# Altium PCB 底板20160428.PcbDoc (part 5 of 5)
Units mm, origin at the board's own origin, x right, y up, seen from the top; angles counter-clockwise.
Board outline 123.72 x 102.71 mm, 2 copper layers (Top Layer, Bottom Layer); 224 components, 227 nets, 768 pads, 282 vias.
Unrouted connection lines stored in the file: 2.
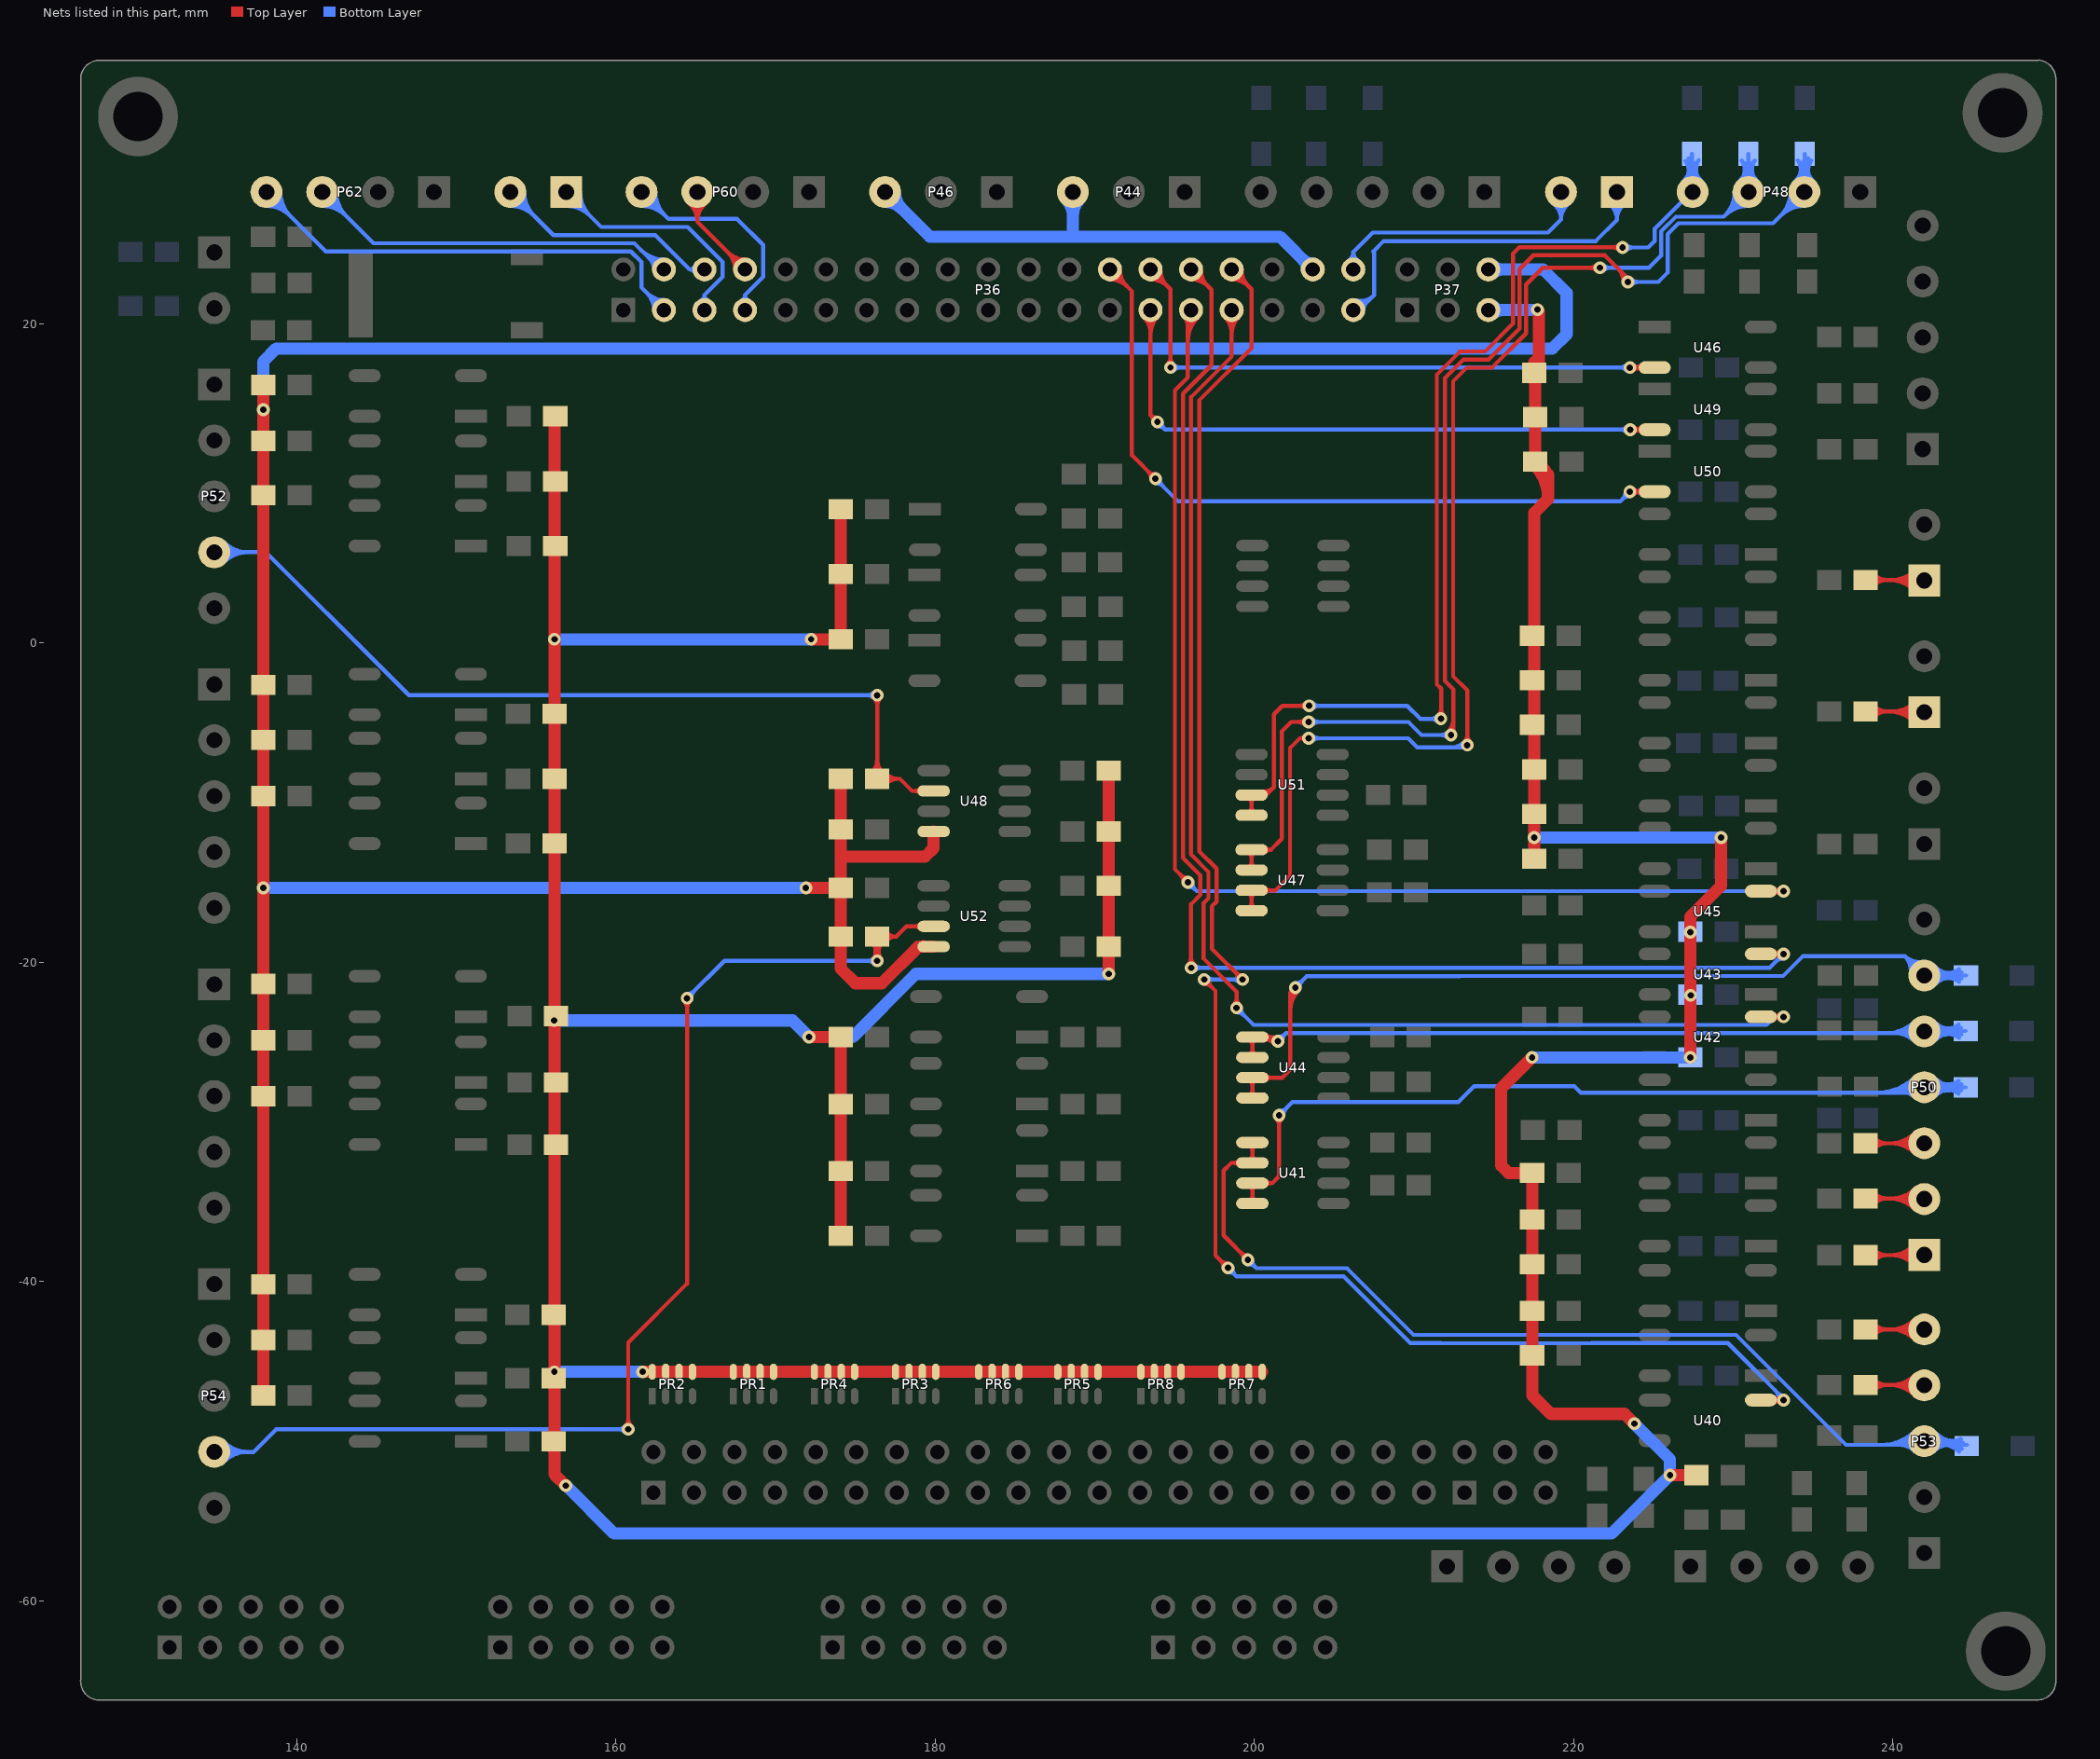
[diagram p5: the nets of this part, all layers, seen from the top]

## Via types
v1: diameter 0.8, hole 0.4, Top Layer to Bottom Layer, 282 vias

## Nets (pads, with @x,y where several pads share a name; then routed paths per layer and width w, separated by ;. In a path a pad name is that pad's centre, name@x,y a point inside that pad or via, vN(x,y) a via of type N, cw(c..) or ccw(c..) an arc to the next point about the centre after c; other vN are vias at no path point) (continued)
PWM33: P52.4 R117.1 U48.6 | length 66.8
  Top Layer w0.254: R117.1@176.018,-8.15 ccw(c175.151,-7.283) 176.378,-7.283 ccw(c177.604,-7.283) R117.1@176.737,-8.15 ; v1@176.185,-3.47 cw(c175.719,-3.936) 176.378,-3.936 cw(c177.037,-3.936) v1@176.571,-3.47 ; v1(176.378,-3.277) R117.1@176.378,-8.509 177.8,-8.509 178.562,-9.271 U48.6@179.908,-9.271 ; R117.1@176.864,-8.868 cw(c177.731,-9.735) 177.731,-8.509 cw(c177.731,-7.283) R117.1@176.864,-8.15 ; U48.6@179.086,-9.433 ccw(c178.696,-9.823) 178.696,-9.271 ccw(c178.696,-8.719) U48.6@179.086,-9.109
  Bottom Layer w0.254: P52.4@134.849,5.681 138.083,5.681 145.669,-1.905 147.041,-3.277 v1(176.378,-3.277) ; P52.4@135.286,5.243 cw(c136.343,4.186) 136.343,5.681 cw(c136.343,7.175) P52.4@135.286,6.118 ; P52.4@135.466,5.063 cw(c136.956,3.573) 136.956,5.681 cw(c136.956,7.788) P52.4@135.466,6.298 ; v1@176.185,-3.47 ccw(c175.719,-3.936) 175.719,-3.277 ccw(c175.719,-2.618) v1@176.185,-3.084
PWM44: P54.4 R134.2 U52.7 | length 91.4
  Top Layer w0.254: v1@160.589,-49.058 ccw(c160.123,-48.592) 160.782,-48.592 ccw(c161.441,-48.592) v1@160.975,-49.058 ; v1(160.782,-49.251) 160.782,-43.815 164.465,-40.132 v1(164.465,-22.25) ; v1@164.272,-22.443 cw(c163.806,-22.909) 164.465,-22.909 cw(c165.124,-22.909) v1@164.658,-22.443 ; R134.2@176.018,-18.749 cw(c175.151,-19.616) 176.378,-19.616 cw(c177.604,-19.616) R134.2@176.737,-18.749 ; v1@176.148,-19.765 ccw(c175.484,-19.336) 176.248,-19.132 ; v1@176.185,-19.721 ccw(c175.719,-19.255) 176.378,-19.255 ccw(c177.037,-19.255) v1@176.571,-19.721 ; v1@176.241,-19.677 ccw(c176.043,-19.334) 176.426,-19.437 ; 176.33,-19.437 ccw(c176.712,-19.334) v1@176.514,-19.677 ; v1(176.378,-19.914) R134.2@176.378,-18.39 177.571,-18.39 ; 176.507,-19.132 ccw(c177.271,-19.336) v1@176.607,-19.765 ; R134.2@176.899,-18.71 cw(c177.571,-19.256) 177.571,-18.39 ; R134.2@176.899,-18.069 ccw(c177.571,-17.524) 177.571,-18.39 ; U52.7@179.086,-17.916 ccw(c178.696,-18.306) 178.696,-17.755 ccw(c178.696,-17.203) U52.7@179.086,-17.593 ; U52.7@179.908,-17.755 178.206,-17.755 177.571,-18.39
  Bottom Layer w0.254: P54.4@134.849,-50.657 134.864,-50.673 137.312,-50.673 138.735,-49.251 v1(160.782,-49.251) ; P54.4@135.286,-51.095 cw(c136.305,-52.114) 136.305,-50.673 ; P54.4@135.286,-50.22 ccw(c136.381,-49.125) 136.381,-50.673 ; P54.4@135.466,-51.275 cw(c136.919,-52.727) 136.919,-50.673 ; P54.4@135.466,-50.04 ccw(c136.994,-48.512) 136.994,-50.673 ; v1@160.589,-49.444 ccw(c160.123,-49.91) 160.123,-49.251 ccw(c160.123,-48.592) v1@160.589,-49.058 ; v1(164.465,-22.25) 166.802,-19.914 v1(176.378,-19.914) ; v1@164.465,-21.977 ccw(c164.465,-21.318) 164.931,-21.784 ccw(c165.397,-22.25) v1@164.738,-22.25 ; v1@176.185,-20.107 ccw(c175.719,-20.573) 175.719,-19.914 ccw(c175.719,-19.255) v1@176.185,-19.721
QD_KR1: D22.2 P43.1 | length 11.2
  Top Layer w0.254: D22.2@238.295,3.944 P43.1@241.928,3.944 ; D22.2@238.781,3.585 cw(c239.648,2.717) 239.648,3.944 cw(c239.648,5.17) D22.2@238.781,4.303 ; 239.775,3.944 cw(c239.775,1.726) P43.1@241.343,3.294 ; 239.93,3.944 ccw(c239.93,5.942) P43.1@241.343,4.529 ; 240.388,3.944 cw(c240.388,2.34) P43.1@241.523,3.474 ; 240.544,3.944 ccw(c240.544,5.328) P43.1@241.523,4.349
QYG_KC1: P36.32 U40.3 | length 122.4
  Top Layer w0.254: v1@196.85,-21.355 cw(c196.85,-22.014) 197.316,-21.548 cw(c197.782,-21.082) v1@197.123,-21.082 ; v1(196.85,-21.082) 197.561,-21.793 197.561,-38.354 v1(198.349,-39.141) ; v1@198.076,-39.141 ccw(c197.417,-39.141) 197.883,-38.675 ccw(c198.349,-38.209) v1@198.349,-38.868 ; P36.32@198.577,22.77 cw(c198.577,21.266) 199.641,22.33 cw(c200.704,23.393) P36.32@199.2,23.393 ; P36.32@198.577,23.024 cw(c198.577,22.134) 199.207,22.763 cw(c199.837,23.393) P36.32@198.946,23.393 ; P36.32@198.577,23.393 199.822,22.149 199.822,18.47 196.545,15.193 196.545,-13.048 197.631,-14.133 197.631,-16.201 197.333,-16.499 197.333,-19.152 v1(199.263,-21.082) ; v1@198.99,-21.082 ccw(c198.331,-21.082) 198.797,-20.616 ccw(c199.263,-20.15) v1@199.263,-20.809 ; U40.3@231.796,-47.421 v1(233.147,-47.422) ; U40.3@232.485,-47.421 cw(c232.485,-48.083) v1@232.954,-47.615 ; U40.3@232.49,-47.421 ccw(c232.49,-46.765) v1@232.954,-47.229 ; U40.3@232.517,-47.614 cw(c232.983,-48.08) 232.983,-47.421 cw(c232.983,-46.762) U40.3@232.517,-47.228 ; v1@232.887,-47.507 ccw(c232.661,-47.58) 232.723,-47.351 ccw(c232.768,-47.182) v1@232.916,-47.276 ; v1@232.887,-47.337 cw(c232.666,-47.265) 232.726,-47.49 cw(c232.77,-47.653) v1@232.914,-47.565
  Bottom Layer w0.254: v1(196.85,-21.082) v1(199.263,-21.082) ; v1@197.043,-21.275 cw(c197.509,-21.741) 197.509,-21.082 cw(c197.509,-20.423) v1@197.043,-20.889 ; v1@198.349,-39.414 cw(c198.349,-40.073) 198.815,-39.607 cw(c199.281,-39.141) v1@198.622,-39.141 ; v1(198.349,-39.141) 198.882,-39.675 205.588,-39.675 209.76,-43.847 211.665,-43.847 211.684,-43.866 221.12,-43.866 221.139,-43.847 229.662,-43.847 233.147,-47.331 v1(233.147,-47.422) ; v1@199.07,-21.275 ccw(c198.604,-21.741) 198.604,-21.082 ccw(c198.604,-20.423) v1@199.07,-20.889 ; 232.617,-46.801 cw(c231.996,-47.422) v1@232.874,-47.422 ; 232.835,-47.02 ccw(c233.147,-46.708) v1@233.147,-47.149
QYG_KC11: D56.1 P53.3 U41.5 U41.6 | length 84.5
  Top Layer w0.254: U41.6@199.051,-32.724 ccw(c198.66,-33.115) 198.66,-32.563 ccw(c198.66,-32.011) U41.6@199.051,-32.401 ; v1@199.32,-38.633 ccw(c198.661,-38.633) 199.127,-38.167 ccw(c199.593,-37.701) v1@199.593,-38.36 ; v1(199.593,-38.633) 198.069,-37.109 198.069,-33.045 198.552,-32.563 U41.6@199.873,-32.563 U41.5@199.873,-31.293 ; U41.6@199.711,-32.401 ccw(c199.321,-32.011) 199.873,-32.011 ccw(c200.424,-32.011) U41.6@200.034,-32.401 ; U41.5@199.711,-31.454 cw(c199.321,-31.845) 199.873,-31.845 cw(c200.424,-31.845) U41.5@200.034,-31.454
  Bottom Layer w0.254: v1@199.593,-38.906 cw(c199.593,-39.565) 200.059,-39.099 cw(c200.525,-38.633) v1@199.866,-38.633 ; v1(199.593,-38.633) 200.127,-39.167 205.798,-39.167 209.97,-43.339 230.168,-43.339 237.055,-50.226 D56.1@244.627,-50.226 ; 239.301,-50.226 ccw(c239.301,-47.338) P53.3@241.343,-49.38 ; 239.914,-50.226 ccw(c239.914,-47.951) P53.3@241.523,-49.56 ; 240.405,-50.226 cw(c240.405,-51.553) P53.3@241.343,-50.615 ; 240.527,-50.226 ccw(c240.527,-48.565) P53.3@241.702,-49.74 ; P53.3@242.218,-49.74 ccw(c243.393,-48.565) 243.393,-50.226 ; P53.3@242.398,-49.56 ccw(c244.007,-47.951) D56.1@244.007,-50.226 ; P53.3@242.578,-50.615 cw(c243.516,-51.553) 243.516,-50.226 ; P53.3@242.578,-49.38 ccw(c244.62,-47.338) D56.1@244.62,-50.226 ; 243.115,-50.226 cw(c243.115,-51.677) D56.1@244.141,-50.651 ; 243.12,-49.824 cw(c242.719,-51.321) D56.1@244.06,-50.546 ; 243.212,-50.065 ccw(c243.479,-48.751) D56.1@244.22,-49.869 ; 243.371,-50.097 cw(c243.15,-51.187) D56.1@244.077,-50.573 ; 243.433,-50.226 ccw(c243.433,-49.224) D56.1@244.141,-49.933 ; 243.561,-49.942 ccw(c243.794,-49.069) D56.1@244.246,-49.852 ; 243.712,-49.983 cw(c243.47,-50.887) D56.1@244.28,-50.419 ; 243.728,-50.226 cw(c243.728,-51.064) D56.1@244.321,-50.472 ; 243.813,-50.187 ccw(c243.958,-49.474) D56.1@244.36,-50.08
QYG_KR1: D15.2 P53.4 | length 11.2
  Top Layer w0.254: D15.2@238.295,-46.475 P53.4@241.938,-46.475 ; D15.2@238.781,-46.834 cw(c239.648,-47.702) 239.648,-46.475 cw(c239.648,-45.249) D15.2@238.781,-46.116 ; 239.799,-46.475 cw(c239.799,-48.659) P53.4@241.343,-47.115 ; 239.907,-46.475 ccw(c239.907,-44.444) P53.4@241.343,-45.88 ; 240.412,-46.475 cw(c240.412,-48.046) P53.4@241.523,-46.935 ; 240.52,-46.475 ccw(c240.52,-45.057) P53.4@241.523,-46.06
QYG_KR2: D19.2 P53.5 | length 11.2
  Top Layer w0.254: D19.2@238.295,-42.995 P53.5@241.958,-42.995 ; D19.2@238.781,-43.355 cw(c239.648,-44.222) 239.648,-42.995 cw(c239.648,-41.769) D19.2@238.781,-42.636 ; 239.848,-42.995 cw(c239.848,-45.11) P53.5@241.343,-43.615 ; 239.858,-42.995 ccw(c239.858,-40.895) P53.5@241.343,-42.38 ; 240.461,-42.995 cw(c240.461,-44.497) P53.5@241.523,-43.435 ; 240.471,-42.995 ccw(c240.471,-41.508) P53.5@241.523,-42.56
RS485_1A: P36.7 P60.4 | length 20.1
  Bottom Layer w0.254: P60.4@161.61,27.372 cw(c161.61,25.264) 163.101,26.754 cw(c164.591,28.245) P60.4@162.483,28.245 ; P60.4@161.61,27.626 cw(c161.61,26.131) 162.667,27.188 cw(c163.724,28.245) P60.4@162.229,28.245 ; P60.4@161.61,28.245 163.299,26.556 166.534,26.556 167.601,26.556 169.228,24.929 169.228,23.862 169.228,22.925 168.097,21.794 ; P36.7@167.854,21.427 ccw(c167.699,21.794) 168.097,21.794 ; P36.7@168.097,20.853 168.097,21.794 ; P36.7@168.34,21.427 cw(c168.496,21.794) 168.097,21.794
RS485_1B: P36.8 P60.3 | length 14.7
  Top Layer w0.254: P60.3@164.551,27.574 cw(c163.556,26.38) 165.11,26.38 ; P60.3@164.714,27.769 cw(c164.008,26.923) 165.11,26.923 cw(c166.213,26.923) P60.3@165.507,27.769 ; P60.3@165.11,28.245 165.11,26.38 ; P60.3@165.669,27.574 ccw(c166.665,26.38) 165.11,26.38 ; P36.8@167.474,23.393 ccw(c165.97,23.393) 167.034,24.457 ccw(c168.097,25.52) P36.8@168.097,24.016 ; P36.8@167.728,23.393 ccw(c166.837,23.393) 167.467,24.023 ccw(c168.097,24.653) P36.8@168.097,23.762 ; P36.8@168.097,23.604 P36.8@168.097,23.393 165.989,25.502 165.11,26.38
RS485_2A: P36.38 P61.2 | length 22.1
  Bottom Layer w0.254: P36.38@205.88,23.93 ccw(c205.551,24.486) 206.197,24.486 ; P36.38@206.197,23.393 206.197,24.486 ; P36.38@206.514,23.93 cw(c206.843,24.486) 206.197,24.486 ; P61.2@218.691,27.541 cw(c217.946,26.523) 219.207,26.523 ; P61.2@218.841,27.745 cw(c218.313,27.024) 219.207,27.024 cw(c220.102,27.024) P61.2@219.573,27.745 ; P61.2@219.207,28.245 219.207,26.523 ; P61.2@219.723,27.541 ccw(c220.469,26.523) 219.207,26.523 ; 206.197,24.486 207.416,25.705 218.389,25.705 219.207,26.523
RS485_2B: P36.37 P61.1 | length 29.1
  Bottom Layer w0.254: P36.37@206.197,20.853 206.578,20.853 207.493,21.768 ; P36.37@206.289,21.211 ccw(c206.521,22.11) 207.178,21.453 ; P36.37@206.353,21.457 ccw(c206.65,22.61) 207.493,21.768 ; P36.37@206.82,20.853 cw(c207.404,20.853) 206.991,21.267 ; P61.1@222.181,27.548 cw(c221.385,26.492) 222.707,26.492 ; P61.1@222.334,27.751 cw(c221.769,27.002) 222.707,27.002 cw(c223.645,27.002) P61.1@223.08,27.751 ; P61.1@222.707,28.245 222.707,26.492 ; P61.1@223.233,27.548 ccw(c224.03,26.492) 222.707,26.492 ; 207.493,21.768 207.493,24.46 207.442,24.511 208.102,25.171 221.386,25.171 222.707,26.492
SPE+: P36.5 P42.1 | length 21.7
  Bottom Layer w0.254: P42.1@156.896,27.372 cw(c156.896,25.264) 158.386,26.754 cw(c159.876,28.245) P42.1@157.769,28.245 ; P42.1@156.896,27.626 cw(c156.896,26.131) 157.952,27.188 cw(c159.009,28.245) P42.1@157.515,28.245 ; P42.1@156.896,28.245 159.092,26.048 164.502,26.048 166.688,23.862 166.688,22.925 165.557,21.794 ; P36.5@165.314,21.427 ccw(c165.159,21.794) 165.557,21.794 ; P36.5@165.557,20.853 165.557,21.794 ; P36.5@165.8,21.427 cw(c165.956,21.794) 165.557,21.794
SPE-: P36.6 P42.2 | length 20.8
  Bottom Layer w0.254: P42.2@153.396,27.372 cw(c153.396,25.264) 154.886,26.754 cw(c156.376,28.245) P42.2@154.269,28.245 ; P42.2@153.396,27.626 cw(c153.396,26.131) 154.452,27.188 cw(c155.509,28.245) P42.2@154.015,28.245 ; P42.2@153.396,28.245 156.1,25.54 162.47,25.54 164.617,23.393 ; P36.6@164.984,23.15 ccw(c164.617,22.995) 164.617,23.393 ; P36.6@164.984,23.636 cw(c164.617,23.792) 164.617,23.393 ; P36.6@165.557,23.393 164.617,23.393
SSD_KC1: P36.28 U46.3 | length 47.2
  Top Layer w0.254: P36.28@193.497,22.77 cw(c193.497,21.266) 194.561,22.33 cw(c195.624,23.393) P36.28@194.12,23.393 ; P36.28@193.497,23.024 cw(c193.497,22.134) 194.127,22.763 cw(c194.757,23.393) P36.28@193.866,23.393 ; P36.28@193.497,23.393 194.742,22.149 v1(194.742,17.247) ; v1@194.549,17.44 ccw(c194.083,17.906) 194.742,17.906 ccw(c195.401,17.906) v1@194.935,17.44 ; v1(223.521,17.246) U46.3@225.074,17.246 ; v1@223.714,17.053 cw(c224.18,16.587) 224.18,17.246 cw(c224.18,17.905) v1@223.714,17.439 ; v1@223.746,17.091 cw(c223.953,16.95) 224.017,17.191 ; v1@223.746,17.4 ccw(c223.953,17.541) 224.017,17.3 ; v1@223.757,17.109 cw(c224.103,16.909) 224,17.295 ; v1@223.757,17.382 ccw(c224.103,17.582) 224,17.196 ; U46.3@224.281,17.053 ccw(c223.815,16.587) 223.815,17.246 ccw(c223.815,17.905) U46.3@224.281,17.439
  Bottom Layer w0.254: v1(194.742,17.247) v1(223.521,17.246) ; v1@194.935,17.054 cw(c195.401,16.587) 195.401,17.247 cw(c195.401,17.906) v1@194.935,17.44 ; v1@223.328,17.053 ccw(c222.862,16.587) 222.862,17.246 ccw(c222.862,17.905) v1@223.328,17.439
SSD_KC2: P36.27 U49.3 | length 48.6
  Top Layer w0.254: P36.27@193.057,20.413 cw(c191.993,19.349) 193.497,19.349 cw(c195.001,19.349) P36.27@193.938,20.413 ; P36.27@193.236,20.592 cw(c192.606,19.963) 193.497,19.963 cw(c194.388,19.963) P36.27@193.758,20.592 ; P36.27@193.497,20.853 193.497,14.275 ; v1@193.656,13.858 ccw(c193.111,13.888) 193.497,14.275 ; v1@193.914,14.116 cw(c193.884,14.661) 193.497,14.275 ; v1(193.929,13.843) 193.497,14.275 ; v1(223.544,13.359) U49.3@225.074,13.359 ; v1@223.737,13.166 cw(c224.203,12.7) 224.203,13.359 cw(c224.203,14.018) v1@223.737,13.552 ; v1@223.771,13.207 cw(c223.966,13.074) 224.027,13.302 cw(c224.131,13.688) v1@223.783,13.493 ; v1@223.771,13.512 ccw(c223.966,13.644) 224.027,13.416 ccw(c224.131,13.031) v1@223.783,13.226 ; U49.3@224.281,13.166 ccw(c223.815,12.7) 223.815,13.359 ccw(c223.815,14.018) U49.3@224.281,13.552
  Bottom Layer w0.254: v1@193.929,13.57 cw(c193.929,12.911) 194.395,13.377 cw(c194.861,13.843) v1@194.202,13.843 ; v1(193.929,13.843) 194.413,13.359 v1(223.544,13.359) ; v1@223.351,13.166 ccw(c222.885,12.7) 222.885,13.359 ccw(c222.885,14.018) v1@223.351,13.552
SSD_KC3: P36.26 U50.3 | length 56.6
  Top Layer w0.254: P36.26@190.957,22.77 cw(c190.957,21.266) 192.021,22.33 cw(c193.084,23.393) P36.26@191.58,23.393 ; P36.26@190.957,23.024 cw(c190.957,22.134) 191.587,22.763 cw(c192.217,23.393) P36.26@191.326,23.393 ; P36.26@190.957,23.393 192.329,22.022 192.329,11.76 v1(193.802,10.287) ; v1@193.529,10.287 ccw(c192.87,10.287) 193.336,10.753 ccw(c193.802,11.219) v1@193.802,10.56 ; v1(223.521,9.473) v1(223.521,9.473) U50.3@225.074,9.473 ; v1@223.714,9.28 cw(c224.18,8.814) 224.18,9.473 cw(c224.18,10.132) v1@223.714,9.666 ; v1@223.746,9.319 cw(c223.953,9.177) 224.017,9.419 ; v1@223.746,9.628 ccw(c223.953,9.769) 224.017,9.527 ; v1@223.757,9.337 cw(c224.103,9.137) 224,9.523 ; v1@223.757,9.61 ccw(c224.103,9.809) 224,9.424 ; U50.3@224.281,9.28 ccw(c223.815,8.814) 223.815,9.473 ccw(c223.815,10.132) U50.3@224.281,9.666
  Bottom Layer w0.254: v1@193.802,10.014 cw(c193.802,9.355) 194.268,9.821 cw(c194.734,10.287) v1@194.075,10.287 ; v1(193.802,10.287) 195.224,8.865 222.912,8.865 v1(223.521,9.473) ; v1@223.248,9.473 cw(c222.589,9.473) 223.055,9.007 cw(c223.521,8.541) v1@223.521,9.2
SSD_KC11: D46.1 P48.2 U47.5 U47.6 | length 106
  Top Layer w0.254: U47.6@199.66,-14.062 ccw(c199.27,-13.672) 199.822,-13.672 ccw(c200.374,-13.672) U47.6@199.983,-14.062 ; U47.5@199.66,-13.116 cw(c199.27,-13.506) 199.822,-13.506 cw(c200.374,-13.506) U47.5@199.983,-13.116 ; U47.6@199.822,-14.224 U47.5@199.822,-12.954 201.041,-12.954 201.727,-12.268 201.727,-5.537 202.311,-4.953 v1@203.378,-4.953 ; U47.5@200.644,-13.116 cw(c201.034,-13.506) 201.034,-12.954 cw(c201.034,-12.402) U47.5@200.644,-12.792 ; v1@203.21,-5.146 ccw(c202.744,-5.612) 202.744,-4.953 ccw(c202.744,-4.294) v1@203.21,-4.76 ; v1@212.126,-5.573 ccw(c211.307,-4.754) 212.465,-4.754 ; v1@212.305,-5.752 ccw(c211.92,-5.367) 212.465,-5.367 ; v1@212.465,-5.62 212.465,-2.907 211.938,-2.38 211.938,16.593 213.092,17.748 214.667,17.748 216.611,19.692 216.611,23.408 217.486,24.282 221.005,24.282 ; 221.964,24.276 221.952,24.276 ; 222.765,23.462 cw(c221.909,22.606) v1@223.12,22.606 ; 223.199,23.029 cw(c222.776,22.606) v1@223.374,22.606 ; v1@223.393,22.835 221.952,24.276 ; 221.005,24.282 221.012,24.276 221.952,24.276 ; 221.005,24.282 221.945,24.282 221.952,24.276
  Bottom Layer w0.254: v1(203.403,-4.953) 209.652,-4.953 210.464,-5.766 v1(212.319,-5.766) ; v1@203.596,-5.146 cw(c204.062,-5.612) 204.062,-4.953 cw(c204.062,-4.294) v1@203.596,-4.76 ; v1@212.126,-5.959 ccw(c211.66,-6.425) 211.66,-5.766 ccw(c211.66,-5.107) v1@212.126,-5.573 ; v1(223.393,22.606) 225.298,22.606 225.882,23.19 225.882,25.603 226.568,26.289 232.491,26.289 P48.2@234.447,28.245 ; v1@223.586,22.413 cw(c224.052,21.947) 224.052,22.606 cw(c224.052,23.265) v1@223.586,22.799 ; P48.2@233.574,28.245 cw(c231.467,28.245) 232.957,26.754 cw(c234.447,25.264) P48.2@234.447,27.372 ; P48.2@233.828,28.245 cw(c232.334,28.245) 233.39,27.188 cw(c234.447,26.131) P48.2@234.447,27.626 ; P48.2@233.83,28.862 ccw(c232.291,30.401) D46.1@234.467,30.401 ; P48.2@234.01,28.682 ccw(c232.904,29.788) 234.467,29.788 ; D46.1@234.045,30.223 cw(c233.162,29.633) 234.188,29.358 ; D46.1@234.108,30.146 cw(c233.241,29.279) 234.467,29.279 cw(c235.694,29.279) D46.1@234.827,30.146 ; 234.193,29.377 cw(c235.289,29.083) D46.1@234.721,30.065 ; D46.1@234.213,30.065 cw(c233.689,29.158) 234.702,29.429 ; P48.2@234.467,28.265 D46.1@234.467,30.632 ; 234.467,29.69 ccw(c235.893,29.69) P48.2@234.885,28.682 ; D46.1@234.467,30.304 ccw(c236.506,30.304) P48.2@235.065,28.862 ; D46.1@234.581,29.88 cw(c235.117,30.023) D46.1@234.671,30.354 ; 234.717,29.372 cw(c235.656,29.623) D46.1@234.875,30.203
SSD_KC22: D48.1 P48.3 U47.7 U47.8 | length 100.9
  Top Layer w0.254: U47.8@199.66,-16.602 ccw(c199.27,-16.212) 199.822,-16.212 ccw(c200.374,-16.212) U47.8@199.983,-16.602 ; U47.7@199.66,-15.656 cw(c199.27,-16.046) 199.822,-16.046 cw(c200.374,-16.046) U47.7@199.983,-15.656 ; U47.8@199.822,-16.764 U47.7@199.822,-15.494 201.32,-15.494 202.235,-14.58 202.235,-6.579 202.844,-5.969 ; U47.7@200.644,-15.656 cw(c201.034,-16.046) 201.034,-15.494 cw(c201.034,-14.942) U47.7@200.644,-15.332 ; v1@203.188,-6.137 ccw(c202.844,-6.404) 202.844,-5.969 ; v1@203.188,-5.801 cw(c202.844,-5.534) 202.844,-5.969 ; v1@203.378,-5.969 202.844,-5.969 ; v1@213.142,-6.208 ccw(c212.676,-5.742) 213.335,-5.742 ccw(c213.994,-5.742) v1@213.528,-6.208 ; v1(213.335,-6.401) 213.335,-2.972 212.446,-2.083 212.446,16.383 213.303,17.24 214.878,17.24 217.018,19.38 217.018,22.443 218.07,23.495 v1(221.64,23.495) ; v1@221.447,23.302 ccw(c220.981,22.836) 220.981,23.495 ccw(c220.981,24.154) v1@221.447,23.688
  Bottom Layer w0.254: v1(203.403,-5.969) 209.626,-5.969 210.204,-6.547 213.189,-6.547 v1(213.335,-6.401) ; v1@203.596,-6.162 cw(c204.062,-6.628) 204.062,-5.969 cw(c204.062,-5.31) v1@203.596,-5.776 ; 212.323,-6.547 ccw(c212.323,-5.389) v1@213.142,-6.208 ; 212.936,-6.547 ccw(c212.936,-6.002) v1@213.321,-6.387 ; v1(221.64,23.495) 224.714,23.495 225.476,24.257 225.476,25.772 226.4,26.695 229.398,26.695 P48.3@230.947,28.245 ; v1@221.833,23.302 cw(c222.299,22.836) 222.299,23.495 cw(c222.299,24.154) v1@221.833,23.688 ; P48.3@230.074,28.245 cw(c227.967,28.245) 229.457,26.754 cw(c230.947,25.264) P48.3@230.947,27.372 ; P48.3@230.328,28.245 cw(c228.834,28.245) 229.89,27.188 cw(c230.947,26.131) P48.3@230.947,27.626 ; P48.3@230.33,28.862 ccw(c228.865,30.327) D48.1@230.937,30.327 ; P48.3@230.509,28.682 ccw(c229.478,29.714) 230.937,29.714 ; D48.1@230.525,30.208 cw(c229.72,29.625) 230.68,29.368 ; D48.1@230.578,30.146 cw(c229.71,29.279) 230.937,29.279 cw(c232.163,29.279) D48.1@231.296,30.146 ; D48.1@230.683,30.065 cw(c230.126,29.101) 231.202,29.389 ; 230.693,29.416 cw(c231.725,29.14) D48.1@231.191,30.065 ; P48.3@230.937,28.255 D48.1@230.937,30.632 ; 230.937,29.764 ccw(c232.467,29.764) P48.3@231.385,28.682 ; D48.1@230.937,30.378 ccw(c233.08,30.378) P48.3@231.565,28.862 ; 231.209,29.361 cw(c232.213,29.63) D48.1@231.356,30.218
SSD_KC33: D50.1 P48.4 U51.7 U51.8 | length 87.1
  Top Layer w0.254: U51.8@199.66,-10.633 ccw(c199.27,-10.243) 199.822,-10.243 ccw(c200.374,-10.243) U51.8@199.983,-10.633 ; U51.7@199.66,-9.687 cw(c199.27,-10.077) 199.822,-10.077 cw(c200.374,-10.077) U51.7@199.983,-9.687 ; U51.8@199.822,-10.795 U51.7@199.822,-9.525 200.736,-9.525 201.219,-9.042 ; U51.7@200.48,-9.55 ccw(c200.524,-9.106) 200.839,-9.422 ; U51.7@200.505,-9.298 ccw(c200.592,-8.416) 201.219,-9.042 ; v1@203.236,-4.13 ccw(c202.77,-4.596) 202.77,-3.937 ccw(c202.77,-3.278) v1@203.236,-3.744 ; v1@203.378,-3.937 201.752,-3.937 201.219,-4.47 201.219,-9.042 ; v1@211.491,-4.557 ccw(c210.979,-4.045) 211.703,-4.045 ; v1@211.703,-4.731 211.703,-2.864 211.43,-2.591 211.43,16.804 212.882,18.256 214.457,18.256 216.205,20.004 216.205,24.384 216.611,24.79 v1@223.088,24.79 ; 211.703,-4.137 ccw(c212.297,-4.137) v1@211.877,-4.557 ; 222.342,24.79 cw(c222.342,24.045) v1@222.87,24.572 ; 222.465,24.79 ccw(c222.465,25.363) v1@222.87,24.958
  Bottom Layer w0.254: v1(203.429,-3.937) 209.575,-3.937 210.388,-4.75 v1(211.684,-4.75) v1@211.538,-4.896 ; v1@203.622,-4.13 cw(c204.088,-4.596) 204.088,-3.937 cw(c204.088,-3.278) v1@203.622,-3.744 ; v1@211.491,-4.943 ccw(c211.025,-5.409) 211.025,-4.75 ccw(c211.025,-4.091) v1@211.491,-4.557 ; v1(223.063,24.765) 224.663,24.765 225.069,25.171 225.069,25.94 227.374,28.245 P48.4@227.447,28.245 ; v1@223.256,24.572 cw(c223.722,24.106) 223.722,24.765 cw(c223.722,25.424) v1@223.256,24.958 ; P48.4@226.83,28.862 ccw(c225.439,30.253) D50.1@227.406,30.253 ; D50.1@227.006,30.192 cw(c226.274,29.619) 227.172,29.379 ; P48.4@227.009,28.682 ccw(c226.052,29.64) 227.406,29.64 ; D50.1@227.047,30.146 cw(c226.18,29.279) 227.406,29.279 cw(c228.633,29.279) D50.1@227.765,30.146 ; D50.1@227.153,30.065 cw(c226.566,29.047) 227.701,29.351 cw(c228.776,29.639) D50.1@227.835,30.234 ; 227.193,29.456 cw(c228.162,29.196) D50.1@227.66,30.065 ; D50.1@227.206,30.349 cw(c226.775,30.012) D50.1@227.304,29.871 ; P48.4@227.406,28.286 D50.1@227.406,30.632 ; 227.406,29.838 ccw(c229.041,29.838) P48.4@227.885,28.682 ; D50.1@227.406,30.451 ccw(c229.654,30.451) P48.4@228.065,28.862
TXX_KC1: P36.31 U42.3 | length 92
  Top Layer w0.254: P36.31@198.137,20.413 cw(c197.073,19.349) 198.577,19.349 cw(c200.081,19.349) P36.31@199.018,20.413 ; P36.31@198.316,20.592 cw(c197.686,19.963) 198.577,19.963 cw(c199.468,19.963) P36.31@198.838,20.592 ; P36.31@198.577,20.853 198.577,17.943 196.037,15.403 196.037,-13.258 197.123,-14.344 197.123,-15.99 196.825,-16.289 196.825,-19.779 198.882,-21.837 v1(198.882,-22.86) ; v1@198.689,-22.667 ccw(c198.223,-22.201) 198.882,-22.201 ccw(c199.541,-22.201) v1@199.075,-22.667 ; U42.3@231.796,-23.418 v1(233.146,-23.418) ; U42.3@232.517,-23.611 cw(c232.983,-24.077) 232.983,-23.418 cw(c232.983,-22.759) U42.3@232.517,-23.225 ; v1@232.886,-23.502 ccw(c232.664,-23.574) 232.724,-23.348 ccw(c232.768,-23.183) v1@232.914,-23.273 ; v1@232.886,-23.334 cw(c232.664,-23.261) 232.724,-23.487 cw(c232.768,-23.653) v1@232.914,-23.562 ; v1@232.953,-23.611 ccw(c232.487,-24.077) 232.487,-23.418 ccw(c232.487,-22.759) v1@232.953,-23.225
  Bottom Layer w0.254: v1@198.882,-23.133 cw(c198.882,-23.792) 199.348,-23.326 cw(c199.814,-22.86) v1@199.155,-22.86 ; v1(198.882,-22.86) 199.949,-23.927 232.087,-23.927 232.596,-23.418 v1(233.146,-23.418) ; v1@232.928,-23.583 ccw(c232.596,-23.834) 232.596,-23.418 ccw(c232.596,-23.001) v1@232.928,-23.253
TXX_KC2: P36.30 U43.3 | length 94.4
  Top Layer w0.254: v1@195.844,-20.152 ccw(c195.378,-19.686) 196.037,-19.686 ccw(c196.696,-19.686) v1@196.23,-20.152 ; v1(196.037,-20.345) 196.037,-16.358 196.615,-15.78 196.615,-14.554 195.529,-13.468 195.529,15.614 197.307,17.392 197.307,22.123 P36.30@196.037,23.393 ; P36.30@196.037,22.77 cw(c196.037,21.266) 197.101,22.33 cw(c198.164,23.393) P36.30@196.66,23.393 ; P36.30@196.037,23.024 cw(c196.037,22.134) 196.667,22.763 cw(c197.297,23.393) P36.30@196.406,23.393 ; U43.3@231.796,-19.481 233.019,-19.481 233.02,-19.482 v1(233.147,-19.482) ; U43.3@232.485,-19.481 cw(c232.485,-20.143) v1@232.954,-19.675 ; U43.3@232.49,-19.481 ccw(c232.49,-18.825) v1@232.954,-19.289 ; U43.3@232.517,-19.674 cw(c232.983,-20.14) 232.983,-19.481 cw(c232.983,-18.822) U43.3@232.517,-19.288 ; v1@232.887,-19.567 ccw(c232.661,-19.64) 232.723,-19.411 ccw(c232.768,-19.242) v1@232.916,-19.336 ; v1@232.887,-19.397 cw(c232.666,-19.325) 232.726,-19.55 cw(c232.77,-19.713) v1@232.914,-19.625
  Bottom Layer w0.254: v1@196.037,-20.352 232.277,-20.352 v1(233.147,-19.482) ; v1@196.23,-20.538 cw(c196.681,-20.989) 196.681,-20.352 ; v1@196.23,-20.152 ccw(c196.712,-19.671) 196.712,-20.352 ; v1@232.874,-19.482 cw(c232.215,-19.482) 232.681,-19.948 cw(c233.147,-20.414) v1@233.147,-19.755
TXX_KC3: P36.29 U45.3 | length 85.9
  Top Layer w0.254: v1@195.561,-14.986 ccw(c194.902,-14.986) 195.368,-14.52 ccw(c195.834,-14.054) v1@195.834,-14.713 ; P36.29@195.597,20.413 cw(c195.024,19.84) 195.834,19.84 ; v1(195.834,-14.986) 195.021,-14.173 195.021,15.824 195.834,16.637 195.834,20.65 P36.29@196.037,20.853 ; 195.834,18.859 cw(c198.032,18.859) P36.29@196.478,20.413 ; 195.834,19.472 cw(c197.419,19.472) P36.29@196.298,20.592 ; 195.834,20.085 cw(c196.805,20.085) P36.29@196.119,20.772 ; U45.3@231.796,-15.544 v1(233.146,-15.544) ; U45.3@232.517,-15.737 cw(c232.983,-16.203) 232.983,-15.544 cw(c232.983,-14.885) U45.3@232.517,-15.351 ; v1@232.886,-15.628 ccw(c232.664,-15.7) 232.724,-15.474 ccw(c232.768,-15.309) v1@232.914,-15.399 ; v1@232.886,-15.46 cw(c232.664,-15.387) 232.724,-15.613 cw(c232.768,-15.779) v1@232.914,-15.688 ; v1@232.953,-15.737 ccw(c232.487,-16.203) 232.487,-15.544 ccw(c232.487,-14.885) v1@232.953,-15.351
  Bottom Layer w0.254: v1@195.834,-15.259 cw(c195.834,-15.918) 196.3,-15.452 cw(c196.766,-14.986) v1@196.107,-14.986 ; v1(195.834,-14.986) 196.392,-15.544 v1(233.146,-15.544) ; v1@232.953,-15.737 ccw(c232.487,-16.203) 232.487,-15.544 ccw(c232.487,-14.885) v1@232.953,-15.351
TXX_KC11: D52.1 P50.4 U41.7 U41.8 | length 75.9
  Top Layer w0.254: U41.8@199.711,-34.941 ccw(c199.321,-34.551) 199.873,-34.551 ccw(c200.424,-34.551) U41.8@200.034,-34.941 ; U41.7@199.711,-33.994 cw(c199.321,-34.385) 199.873,-34.385 cw(c200.424,-34.385) U41.7@200.034,-33.994 ; U41.8@199.873,-35.103 U41.7@199.873,-33.833 201.117,-33.833 201.549,-33.401 v1(201.549,-29.591) ; U41.7@200.695,-33.994 cw(c201.085,-34.385) 201.085,-33.833 cw(c201.085,-33.281) U41.7@200.695,-33.671 ; v1@201.356,-29.784 cw(c200.89,-30.25) 201.549,-30.25 cw(c202.208,-30.25) v1@201.742,-29.784
  Bottom Layer w0.254: v1(201.549,-29.591) 202.38,-28.76 212.769,-28.76 213.766,-27.762 220.04,-27.762 220.447,-28.169 241.62,-28.169 P50.4@241.96,-27.829 ; v1@201.549,-29.318 ccw(c201.549,-28.659) 202.015,-29.125 ccw(c202.481,-29.591) v1@201.822,-29.591 ; 239.032,-28.169 ccw(c239.032,-24.9) P50.4@241.343,-27.211 ; 239.645,-28.169 ccw(c239.645,-25.513) P50.4@241.523,-27.391 ; 240.258,-28.169 ccw(c240.258,-26.127) P50.4@241.702,-27.571 ; 240.674,-28.169 cw(c240.674,-29.115) P50.4@241.343,-28.446 ; 240.872,-28.169 ccw(c240.872,-26.74) P50.4@241.882,-27.75 ; P50.4@241.97,-27.838 D52.1@244.551,-27.838 ; P50.4@242.398,-28.266 cw(c243.431,-29.299) 243.431,-27.838 ; P50.4@242.398,-27.391 ccw(c243.478,-26.311) 243.478,-27.838 ; P50.4@242.578,-28.446 cw(c244.044,-29.913) D52.1@244.044,-27.838 ; P50.4@242.578,-27.211 ccw(c244.092,-25.697) D52.1@244.092,-27.838 ; 243.206,-27.611 ccw(c243.475,-26.563) D52.1@244.121,-27.431 ; 243.225,-28.046 cw(c243.474,-29.032) D52.1@244.108,-28.236 ; 243.409,-27.663 cw(c243.174,-28.577) D52.1@243.987,-28.097 ; 243.43,-27.994 ccw(c243.208,-27.113) D52.1@243.988,-27.578 ; 243.721,-27.743 ccw(c243.883,-27.111) D52.1@244.273,-27.635 ; 243.722,-27.92 cw(c243.876,-28.528) D52.1@244.266,-28.037 ; D52.1@244.065,-28.198 ccw(c243.198,-29.065) 243.198,-27.838 ccw(c243.198,-26.612) D52.1@244.065,-27.479
TXX_KC22: D53.1 P50.5 U44.5 U44.6 | length 71.5
  Top Layer w0.254: U44.6@199.711,-25.797 ccw(c199.321,-25.407) 199.873,-25.407 ccw(c200.424,-25.407) U44.6@200.034,-25.797 ; U44.5@199.711,-24.85 cw(c199.321,-25.241) 199.873,-25.241 cw(c200.424,-25.241) U44.5@200.034,-24.85 ; U44.6@199.873,-25.959 U44.5@199.873,-24.689 201.219,-24.689 v1(201.473,-24.943) ; U44.5@200.201,-24.689 cw(c200.201,-26.215) v1@201.28,-25.136 ; U44.5@200.695,-24.85 cw(c201.085,-25.241) 201.085,-24.689 cw(c201.085,-24.137) U44.5@200.695,-24.527 ; U44.5@200.814,-24.689 cw(c200.814,-25.602) v1@201.459,-24.956 ; U44.5@200.842,-24.624 cw(c200.711,-25.114) v1@201.206,-25.003 ; 201.14,-24.704 cw(c201.008,-25.197) v1@201.456,-24.952
  Bottom Layer w0.254: v1(201.473,-24.943) 201.981,-24.435 241.854,-24.435 P50.5@241.96,-24.329 ; v1@201.473,-24.67 ccw(c201.473,-24.011) 201.939,-24.477 ccw(c202.405,-24.943) v1@201.746,-24.943 ; 239.596,-24.435 ccw(c239.596,-21.965) P50.5@241.343,-23.711 ; 240.109,-24.435 cw(c240.109,-26.18) P50.5@241.343,-24.946 ; 240.21,-24.435 ccw(c240.21,-22.578) P50.5@241.523,-23.891 ; 240.722,-24.435 cw(c240.722,-25.567) P50.5@241.523,-24.766 ; 240.823,-24.435 ccw(c240.823,-23.191) P50.5@241.702,-24.071 ; P50.5@241.981,-24.308 D53.1@244.551,-24.308 ; P50.5@242.398,-24.766 cw(c243.505,-25.873) 243.505,-24.308 ; P50.5@242.398,-23.891 ccw(c243.405,-22.884) 243.405,-24.308 ; P50.5@242.578,-24.946 cw(c244.118,-26.486) D53.1@244.118,-24.308 ; P50.5@242.578,-23.711 ccw(c244.018,-22.271) D53.1@244.018,-24.308 ; 243.195,-24.547 cw(c243.476,-25.631) D53.1@244.128,-24.721 ; 243.236,-24.112 ccw(c243.475,-23.159) D53.1@244.101,-23.916 ; 243.397,-24.495 ccw(c243.155,-23.561) D53.1@243.986,-24.05 ; 243.442,-24.163 cw(c243.226,-25.026) D53.1@243.988,-24.569 ; 243.721,-24.411 cw(c243.888,-25.056) D53.1@244.276,-24.514 ; 243.723,-24.234 ccw(c243.872,-23.64) D53.1@244.262,-24.112 ; D53.1@244.065,-24.667 ccw(c243.198,-25.534) 243.198,-24.308 ccw(c243.198,-23.081) D53.1@244.065,-23.949
TXX_KC33: D55.1 P50.6 U44.7 U44.8 | length 84.5
  Top Layer w0.254: U44.8@199.711,-28.337 ccw(c199.321,-27.947) 199.873,-27.947 ccw(c200.424,-27.947) U44.8@200.034,-28.337 ; U44.7@199.711,-27.39 cw(c199.321,-27.781) 199.873,-27.781 cw(c200.424,-27.781) U44.7@200.034,-27.39 ; U44.8@199.873,-28.499 U44.7@199.873,-27.229 201.752,-27.229 202.254,-26.727 202.254,-21.901 ; U44.7@200.695,-27.39 cw(c201.085,-27.781) 201.085,-27.229 cw(c201.085,-26.677) U44.7@200.695,-27.067 ; 202.254,-23 cw(c203.975,-23) v1@202.758,-21.783 ; 202.254,-22.387 cw(c203.362,-22.387) v1@202.578,-21.603 ; v1@202.306,-21.677 cw(c202.1,-21.747) 202.254,-21.901 ; v1@202.478,-21.849 ccw(c202.408,-22.055) 202.254,-21.901 ; v1(202.565,-21.59) 202.254,-21.901
  Bottom Layer w0.254: v1(202.565,-21.59) 203.276,-20.879 ; v1@202.565,-21.317 ccw(c202.565,-20.658) 203.031,-21.124 ccw(c203.497,-21.59) v1@202.838,-21.59 ; 212.865,-20.879 203.276,-20.879 ; P50.6@241.097,-20.697 ccw(c239.844,-20.505) 240.741,-19.609 ; P50.6@241.348,-20.735 ccw(c240.46,-20.599) 241.096,-19.964 ccw(c241.731,-19.328) P50.6@241.867,-20.217 ; P50.6@241.829,-19.966 cw(c241.637,-18.712) 240.741,-19.609 ; P50.6@242.398,-21.266 cw(c243.456,-22.324) 243.456,-20.828 ; P50.6@242.398,-20.391 ccw(c243.453,-19.336) 243.453,-20.828 ; P50.6@242.578,-21.446 cw(c244.069,-22.938) D55.1@244.069,-20.828 ; P50.6@242.578,-20.211 ccw(c244.067,-18.722) D55.1@244.067,-20.828 ; 243.25,-21.032 cw(c243.496,-22.02) D55.1@244.132,-21.225 ; 243.251,-20.626 ccw(c243.496,-19.64) D55.1@244.132,-20.432 ; 243.452,-20.981 ccw(c243.232,-20.095) D55.1@244.014,-20.566 ; 243.453,-20.676 cw(c243.234,-21.56) D55.1@244.014,-21.09 ; 243.749,-20.908 cw(c243.9,-21.515) D55.1@244.291,-21.026 ; 243.749,-20.749 ccw(c243.899,-20.143) D55.1@244.291,-20.63 ; D55.1@244.09,-21.187 ccw(c243.223,-22.054) 243.223,-20.828 ccw(c243.223,-19.602) D55.1@244.09,-20.469 ; D55.1@244.577,-20.828 P50.6@241.96,-20.829 240.741,-19.609 ; 203.276,-20.879 203.295,-20.86 233.115,-20.86 234.366,-19.609 240.741,-19.609
TXX_KR1: D23.2 P50.1 | length 11.2
  Top Layer w0.254: D23.2@238.295,-38.347 P50.1@241.942,-38.347 ; D23.2@238.781,-38.706 cw(c239.648,-39.574) 239.648,-38.347 cw(c239.648,-37.121) D23.2@238.781,-37.988 ; 239.808,-38.347 ccw(c239.808,-36.176) P50.1@241.343,-37.711 ; 239.898,-38.347 cw(c239.898,-40.391) P50.1@241.343,-38.946 ; 240.421,-38.347 ccw(c240.421,-36.789) P50.1@241.523,-37.891 ; 240.511,-38.347 cw(c240.511,-39.778) P50.1@241.523,-38.766
TXX_KR2: D27.2 P50.2 | length 11.2
  Top Layer w0.254: D27.2@238.295,-34.791 P50.2@241.923,-34.791 ; D27.2@238.781,-35.15 cw(c239.648,-36.018) 239.648,-34.791 cw(c239.648,-33.565) D27.2@238.781,-34.432 ; 239.763,-34.791 cw(c239.763,-37.026) P50.2@241.343,-35.446 ; 239.943,-34.791 ccw(c239.943,-32.811) P50.2@241.343,-34.211 ; 240.376,-34.791 cw(c240.376,-36.413) P50.2@241.523,-35.266 ; 240.556,-34.791 ccw(c240.556,-33.424) P50.2@241.523,-34.391
TXX_KR3: D32.2 P50.3 | length 11.2
  Top Layer w0.254: D32.2@238.295,-31.337 P50.3@241.952,-31.337 ; D32.2@238.781,-31.696 cw(c239.648,-32.563) 239.648,-31.337 cw(c239.648,-30.11) D32.2@238.781,-30.978 ; 239.833,-31.337 ccw(c239.833,-29.201) P50.3@241.343,-30.711 ; 239.873,-31.337 cw(c239.873,-33.416) P50.3@241.343,-31.946 ; 240.446,-31.337 ccw(c240.446,-29.814) P50.3@241.523,-30.891 ; 240.486,-31.337 cw(c240.486,-32.803) P50.3@241.523,-31.766
TZ_KR1: D18.2 P45.1 | length 12
  Top Layer w0.254: D18.2@238.295,-4.286 P45.1@241.903,-4.286 ; D18.2@238.781,-4.645 cw(c239.648,-5.512) 239.648,-4.286 cw(c239.648,-3.059) D18.2@238.781,-3.927 ; 239.714,-4.286 cw(c239.714,-6.59) P45.1@241.343,-4.961 ; 239.992,-4.286 ccw(c239.992,-2.375) P45.1@241.343,-3.726 ; 240.327,-4.286 cw(c240.327,-5.977) P45.1@241.523,-4.781 ; 240.605,-4.286 ccw(c240.605,-2.988) P45.1@241.523,-3.906 ; 240.94,-4.286 cw(c240.94,-5.364) P45.1@241.702,-4.601
U2_RX: P36.3 P62.4 | length 38.3
  Bottom Layer w0.254: P62.4@138.115,27.372 cw(c138.115,25.264) 139.606,26.754 cw(c141.096,28.245) P62.4@138.988,28.245 ; P62.4@138.115,27.626 cw(c138.115,26.131) 139.172,27.188 cw(c140.229,28.245) P62.4@138.734,28.245 ; P62.4@138.115,28.245 141.836,24.524 160.946,24.524 161.608,23.862 161.608,22.262 P36.3@163.017,20.853 ; P36.3@162.394,20.853 ccw(c160.89,20.853) 161.954,21.917 ccw(c163.017,22.98) P36.3@163.017,21.476 ; P36.3@162.648,20.853 ccw(c161.757,20.853) 162.387,21.483 ccw(c163.017,22.113) P36.3@163.017,21.222
U2_TX: P36.4 P62.3 | length 32.6
  Bottom Layer w0.254: P62.3@141.615,27.372 cw(c141.615,25.264) 143.106,26.754 cw(c144.596,28.245) P62.3@142.488,28.245 ; P62.3@141.615,27.626 cw(c141.615,26.131) 142.672,27.188 cw(c143.729,28.245) P62.3@142.234,28.245 ; P62.3@141.615,28.245 144.828,25.032 161.156,25.032 162.795,23.393 P36.4@163.017,23.393 ; 161.575,24.614 ccw(c163.017,26.057) P36.4@163.017,24.016 ; 162.008,24.18 ccw(c163.017,25.189) P36.4@163.017,23.762 ; 162.111,24.078 cw(c161.426,23.393) P36.4@162.394,23.393
VCC3.3_B: P36.36 P37.5 P44.3 P46.3 PR1.5 PR1.6 PR1.7 PR1.8 PR2.5 PR2.6 PR2.7 PR2.8 PR3.5 PR3.6 PR3.7 PR3.8 PR4.5 PR4.6 PR4.7 PR4.8 PR5.5 PR5.6 PR5.7 PR5.8 PR6.5 PR6.6 PR6.7 PR6.8 PR7.5 PR7.6 PR7.7 PR7.8 PR8.5 PR8.6 PR8.7 PR8.8 R42.2 R44.2 R49.2 R50.2 R51.2 R53.2 R57.2 R58.2 R59.2 R60.2 R65.2 R66.2 R67.2 R68.2 R73.2 R74.2 R75.2 R76.2 R81.2 R82.2 R83.2 R84.2 R86.2 R88.2 R90.2 R92.2 R94.2 R96.2 R100.2 R104.2 R109.2 R113.2 R115.2 R119.2 R122.2 R125.2 R129.2 R130.2 R136.2 R137.2 R141.2 | length 440.3
  Top Layer w0.762: R90.2@155.929,-50.192 cw(c155.373,-50.748) 156.159,-50.748 ; R90.2@155.929,-49.833 ccw(c155.373,-49.277) 156.159,-49.277 ; R92.2@155.929,-46.23 cw(c155.373,-46.786) 156.159,-46.786 ; R92.2@155.929,-45.871 ccw(c155.373,-45.314) v1@156.159,-45.314 ; R94.2@155.929,-42.267 cw(c155.373,-42.824) 156.159,-42.824 ; R94.2@155.929,-41.908 ccw(c155.373,-41.352) 156.159,-41.352 ; R60.2@155.954,-31.599 cw(c155.459,-32.094) 156.159,-32.094 ; R60.2@155.954,-31.24 ccw(c155.459,-30.745) 156.159,-30.745 ; R68.2@155.954,-27.713 cw(c155.459,-28.208) 156.159,-28.208 ; R68.2@155.954,-27.354 ccw(c155.459,-26.859) 156.159,-26.859 ; R76.2@155.954,-23.548 cw(c155.459,-24.043) v1@156.159,-24.043 ; R76.2@155.954,-23.188 ccw(c155.459,-22.693) 156.159,-22.693 ; 156.159,5.335 cw(c156.946,5.335) R84.2@156.39,5.891 ; 156.159,6.806 ccw(c156.946,6.806) R84.2@156.39,6.25 ; 156.159,9.373 cw(c156.946,9.373) R86.2@156.39,9.93 ; 156.159,10.845 ccw(c156.946,10.845) R86.2@156.39,10.289 ; 156.159,13.463 cw(c156.946,13.463) R88.2@156.39,14.019 ; R88.2@156.159,14.199 R53.2@156.159,-4.445 156.159,-52.07 v1(156.87,-52.781) ; v1(161.688,-45.653) PR2.8@162.285,-45.653 PR2.7@163.123,-45.653 PR2.6@163.961,-45.653 PR2.5@164.8,-45.653 PR1.8@167.365,-45.653 PR1.7@168.203,-45.653 PR1.6@169.041,-45.653 PR1.5@169.88,-45.653 PR4.8@172.445,-45.653 PR4.7@173.283,-45.653 PR4.6@174.121,-45.653 PR4.5@174.96,-45.653 PR3.8@177.525,-45.653 PR3.7@178.363,-45.653 PR3.6@179.201,-45.653 PR3.5@180.04,-45.653 PR6.8@182.732,-45.653 PR6.7@183.57,-45.653 PR6.6@184.408,-45.653 PR6.5@185.247,-45.653 PR5.8@187.685,-45.653 PR5.7@188.523,-45.653 PR5.6@189.361,-45.653 PR5.5@190.2,-45.653 PR8.8@192.892,-45.653 PR8.7@193.73,-45.653 PR8.6@194.568,-45.653 PR8.5@195.407,-45.653 PR7.8@197.972,-45.653 PR7.7@198.81,-45.653 PR7.6@199.648,-45.653 PR7.5@200.487,-45.653 ; v1(172.11,-24.689) R81.2@174.092,-24.689 R73.2@174.092,-28.88 R59.2@174.092,-33.071 R51.2@174.092,-37.135 ; v1(172.237,0.229) R137.2@174.092,0.229 R141.2@174.092,4.318 R130.2@174.092,8.382 ; v1(190.881,-20.726) R136.2@190.881,-19.025 R129.2@190.881,-15.215 R122.2@190.881,-11.811 R115.2@190.881,-8.001 ; R113.2@217.346,16.737 cw(c216.79,16.181) 217.576,16.181 ; v1(217.399,-25.959) 215.468,-27.889 215.468,-32.741 215.925,-33.198 R82.2@217.399,-33.198 R74.2@217.399,-36.119 R66.2@217.399,-38.913 R58.2@217.399,-41.834 R50.2@217.399,-44.628 217.399,-47.117 218.567,-48.285 223.19,-48.285 v1(223.799,-48.895) ; R113.2@217.473,17.096 ccw(c216.61,17.959) 217.83,17.959 ; R113.2@217.483,17.106 ccw(c216.79,17.882) 217.83,17.882 ; R125.2@217.524,11.174 cw(c215.435,9.085) 218.389,9.085 ; R49.2@217.526,-13.513 R57.2@217.526,-10.719 R65.2@217.526,-7.925 217.526,8.153 218.389,9.017 218.389,10.541 R125.2@217.576,11.354 R119.2@217.576,14.148 R113.2@217.576,16.866 ; R113.2@217.526,16.916 217.526,17.577 217.83,17.882 ; R125.2@217.672,11.102 cw(c217.572,10.29) 218.389,10.29 ; v1(217.729,20.879) 217.83,20.777 217.83,17.882 ; R125.2@217.957,11.354 ccw(c218.877,11.354) 218.227,10.703 ; v1(226.035,-52.121) R96.2@227.686,-52.121 ; v1(227.305,-25.959) v1(227.305,-18.11) 227.305,-17.145 229.235,-15.215 v1(229.235,-12.192)
  Bottom Layer w0.762: v1(156.134,-23.647) 171.069,-23.647 v1(172.11,-24.689) 174.828,-24.689 178.791,-20.726 v1(190.881,-20.726) ; v1(156.15,-45.653) v1(161.688,-45.653) ; v1(156.159,0.229) v1(172.237,0.229) ; v1@156.883,-52.768 159.893,-55.778 222.377,-55.778 v1(226.035,-52.121) 226.035,-51.13 v1(223.799,-48.895) ; P46.3@176.871,27.626 cw(c176.871,26.131) 177.927,27.188 cw(c178.984,28.245) P46.3@177.49,28.245 ; P46.3@176.871,28.245 179.665,25.451 201.6,25.451 P36.36@203.657,23.393 ; P44.3@188.193,27.807 cw(c187.136,26.75) 188.631,26.75 cw(c190.125,26.75) P44.3@189.068,27.807 ; 188.631,25.563 P44.3@188.631,28.245 ; P36.36@203.288,23.393 ccw(c202.397,23.393) 203.027,24.023 ccw(c203.657,24.653) P36.36@203.657,23.762 ; P37.5@214.655,20.853 v1@217.653,20.853 ; P37.5@214.916,20.592 cw(c215.546,19.963) 215.546,20.853 cw(c215.546,21.744) P37.5@214.916,21.114 ; v1(217.399,-25.959) v1(227.305,-25.959) ; v1(217.526,-12.192) v1(229.235,-12.192)
  other v1: 227.33,-22.073
VCC5: P37.6 R43.2 R45.2 R54.2 R61.2 R69.2 R77.2 R85.2 R87.2 R89.2 R91.2 R93.2 R95.2 R117.2 R121.1 R132.2 R134.1 U48.8 U52.8 | length 221
  Top Layer w0.762: R91.2@137.914,-47.136 R93.2@137.914,-43.656 R95.2@137.914,-40.176 R61.2@137.914,-28.39 R69.2@137.914,-24.885 R77.2@137.914,-21.355 R43.2@137.914,-9.594 R45.2@137.914,-6.071 R54.2@137.914,-2.635 R85.2@137.914,9.252 R87.2@137.914,12.656 R89.2@137.914,16.161 ; v1(171.907,-15.342) R132.2@174.092,-15.342 ; R117.2@174.092,-8.509 R121.1@174.092,-11.684 174.092,-13.386 ; 178.771,-19.197 cw(c179.248,-19.674) U52.8@179.248,-18.999 ; U52.8@179.908,-19.025 178.943,-19.025 176.657,-21.311 175.006,-21.311 174.092,-20.396 R134.1@174.092,-18.39 R132.2@174.092,-15.342 ; U48.8@179.908,-11.811 179.908,-12.852 179.375,-13.386 174.092,-13.386 ; R132.2@174.092,-15.342 174.092,-13.386
  Bottom Layer w0.762: v1(137.922,-15.342) v1(171.907,-15.342) ; v1(137.922,14.605) 137.922,17.628 138.735,18.44 218.669,18.44 219.558,19.329 219.558,21.92 218.084,23.393 P37.6@214.655,23.393 ; P37.6@214.916,23.132 cw(c215.546,22.503) 215.546,23.393 cw(c215.546,24.284) P37.6@214.916,23.654
pads on no net: P1.6

## Keep-outs
Keep-Out Layer:
  lines w0.2: 126.583,-64.928 ccw(c127.645,-65.04) 127.533,-66.102 ; 126.588,35.433 cw(c127.651,35.322) 127.762,36.384 ; 126.594,-65.176 126.594,35.458 ; 127.519,-66.102 249.143,-66.102 ; 127.533,36.398 249.123,36.398 ; 248.92,-66.102 ccw(c249.031,-65.04) 250.094,-65.151 250.094,35.428 ; 249.138,36.403 cw(c249.026,35.341) 250.088,35.23

## Silkscreen, mask and mechanical layers (free items; w line width, h text height)
Bottom Overlay:
  text "电位器1" at 180.01,30.455 h1 r270
  text "电位器2" at 191.745,30.353 h1 r270
  text "SPEEK+" at 156.312,30.302 h1 r270
  text "地标RX" at 137.643,30.277 h1 r270
  text "+24V" at 148.082,30.277 h1 r270
  text "GND" at 144.526,30.251 h1 r270
  text "地标TX" at 141.097,30.226 h1 r270
  text "SPEEK-" at 152.832,30.201 h1 r270
  text "+24V" at 237.363,29.972 h1 r270
  text "RS485A" at 218.542,29.769 h1 r270
  text "RS485B" at 222.148,29.693 h1 r270
  text "+24V" at 171.475,29.642 h1 r270
  text "GND" at 210.337,29.642 h1 r270
  text "RS485A" at 161.036,29.591 h1 r270
  text "GND" at 168.097,29.591 h1 r270
  text "RS485B" at 164.49,29.566 h1 r270
  text "+24V" at 213.843,29.54 h1 r270
  text "GND" at 243.408,26.645 h1 r180
  text "PW_VCC" at 141.58,24.206 h1.2
  text "+24V" at 243.459,23.063 h1 r180
  text "PW_GND" at 141.605,20.726 h1.2
  text "备用开入3" at 247.701,18.669 h1
  text "电机3开出1" at 133.147,15.773 h1
  text "备用开入2" at 247.752,15.342 h1
  text "电机3开出2" at 133.223,12.243 h1
  text "备用开入1" at 247.701,11.76 h1
  text "电机3开出1" at 133.198,8.941 h1
  text "GND" at 243.713,7.874 h1 r180
  text "电机3开出PWM" at 133.325,5.359 h1
  text "启动" at 245.364,3.607 h1
  text "GND" at 133.248,1.803 h1
  text "GND" at 243.357,-0.483 h1 r180
  text "电机1开出3" at 132.994,-3.023 h1
  text "停止" at 245.415,-4.674 h1
  text "电机1开出2" at 133.071,-6.426 h1
  text "GND" at 243.383,-8.585 h1 r180
  text "电机1开出1" at 133.121,-10.058 h1
  text "IO板V1.2-20160429" at 158.547,-12.294 h1.52
  text "急停" at 245.466,-12.878 h1
  text "电机1开出PWM" at 133.299,-13.614 h1
  text "GND" at 243.535,-16.942 h1 r180
  text "GND" at 133.274,-17.12 h1
  text "http://www.chenghe.info/" at 162.865,-19.152 h1.52
  text "电机2开出3" at 133.121,-21.641 h1
  text "电机2开出2" at 133.198,-24.917 h1
  text "电机2开出1" at 133.223,-28.702 h1
  text "通讯开入3" at 248.031,-31.75 h1
  text "电机2开出PWM" at 133.299,-32.207 h1
  text "通讯开入2" at 248.107,-35.408 h1
  text "GND" at 133.528,-35.916 h1
  text "通讯开入1" at 248.056,-38.71 h1
  text "电机4开出3" at 132.436,-40.386 h1
  text "牵引杆开入2" at 248.793,-43.332 h1
  text "电机4开出2" at 132.41,-43.866 h1
  text "牵引杆开入1" at 248.844,-46.888 h1
  text "电机4开出1" at 132.436,-47.346 h1
  text "电机4开出PWM" at 133.299,-51.13 h1
  text "GND" at 243.434,-53.188 h1 r180
  text "GND" at 133.325,-54.585 h1
  text "+24V" at 243.688,-56.49 h1 r180
  text "+24V" at 212.471,-59.411 h1 r90
  text "GND" at 216.002,-59.461 h1 r90
  text "+24V" at 227.686,-59.487 h1 r90
  text "GND" at 231.292,-59.512 h1 r90
  text "避障2" at 221.107,-59.842 h1 r90
  text "避障1" at 236.271,-60.046 h1 r90